# Altium PCB BRD111111.PcbDoc
Units mil, origin at the board's own origin, x right, y up, seen from the top; angles counter-clockwise.
Board outline 4736.44 x 3358.49 mil, 2 copper layers (Top Layer, Bottom Layer), stack 65.792 mil thick; 71 components, 46 nets, 247 pads, 110 vias.
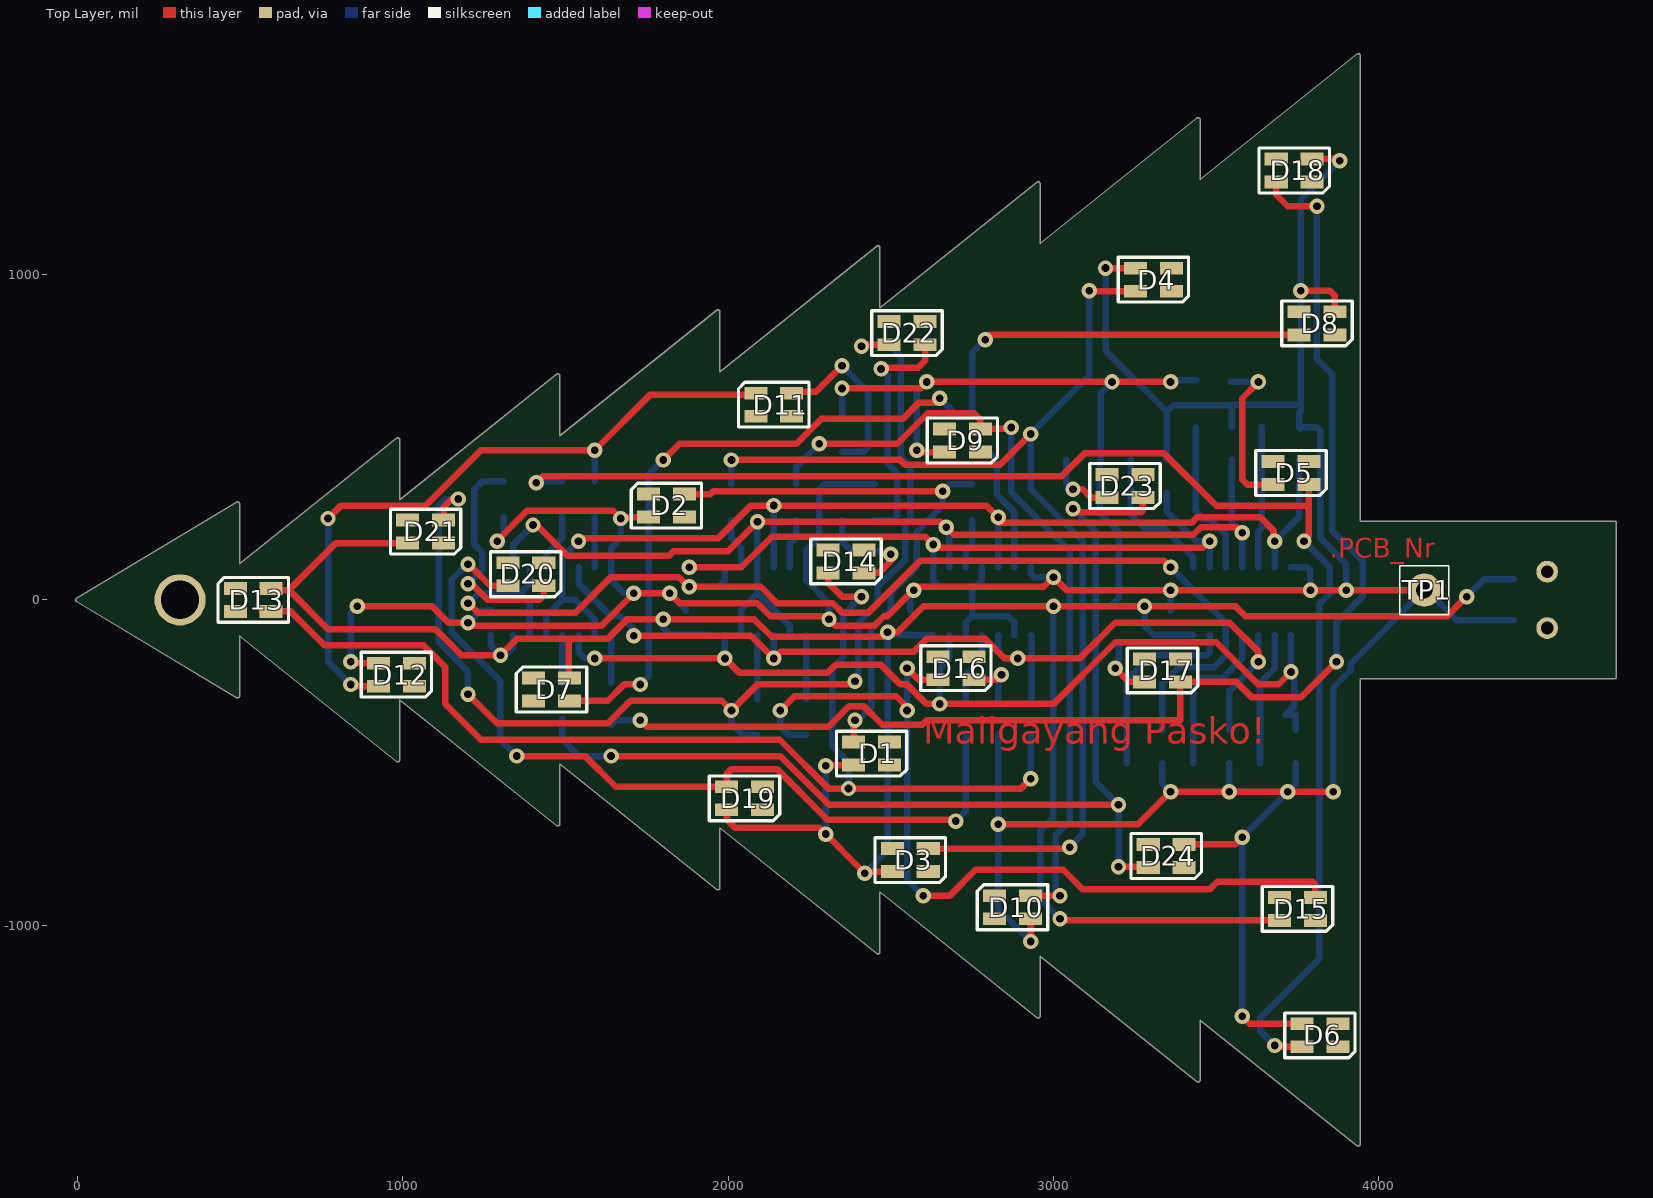
[diagram p0: Top Layer view]
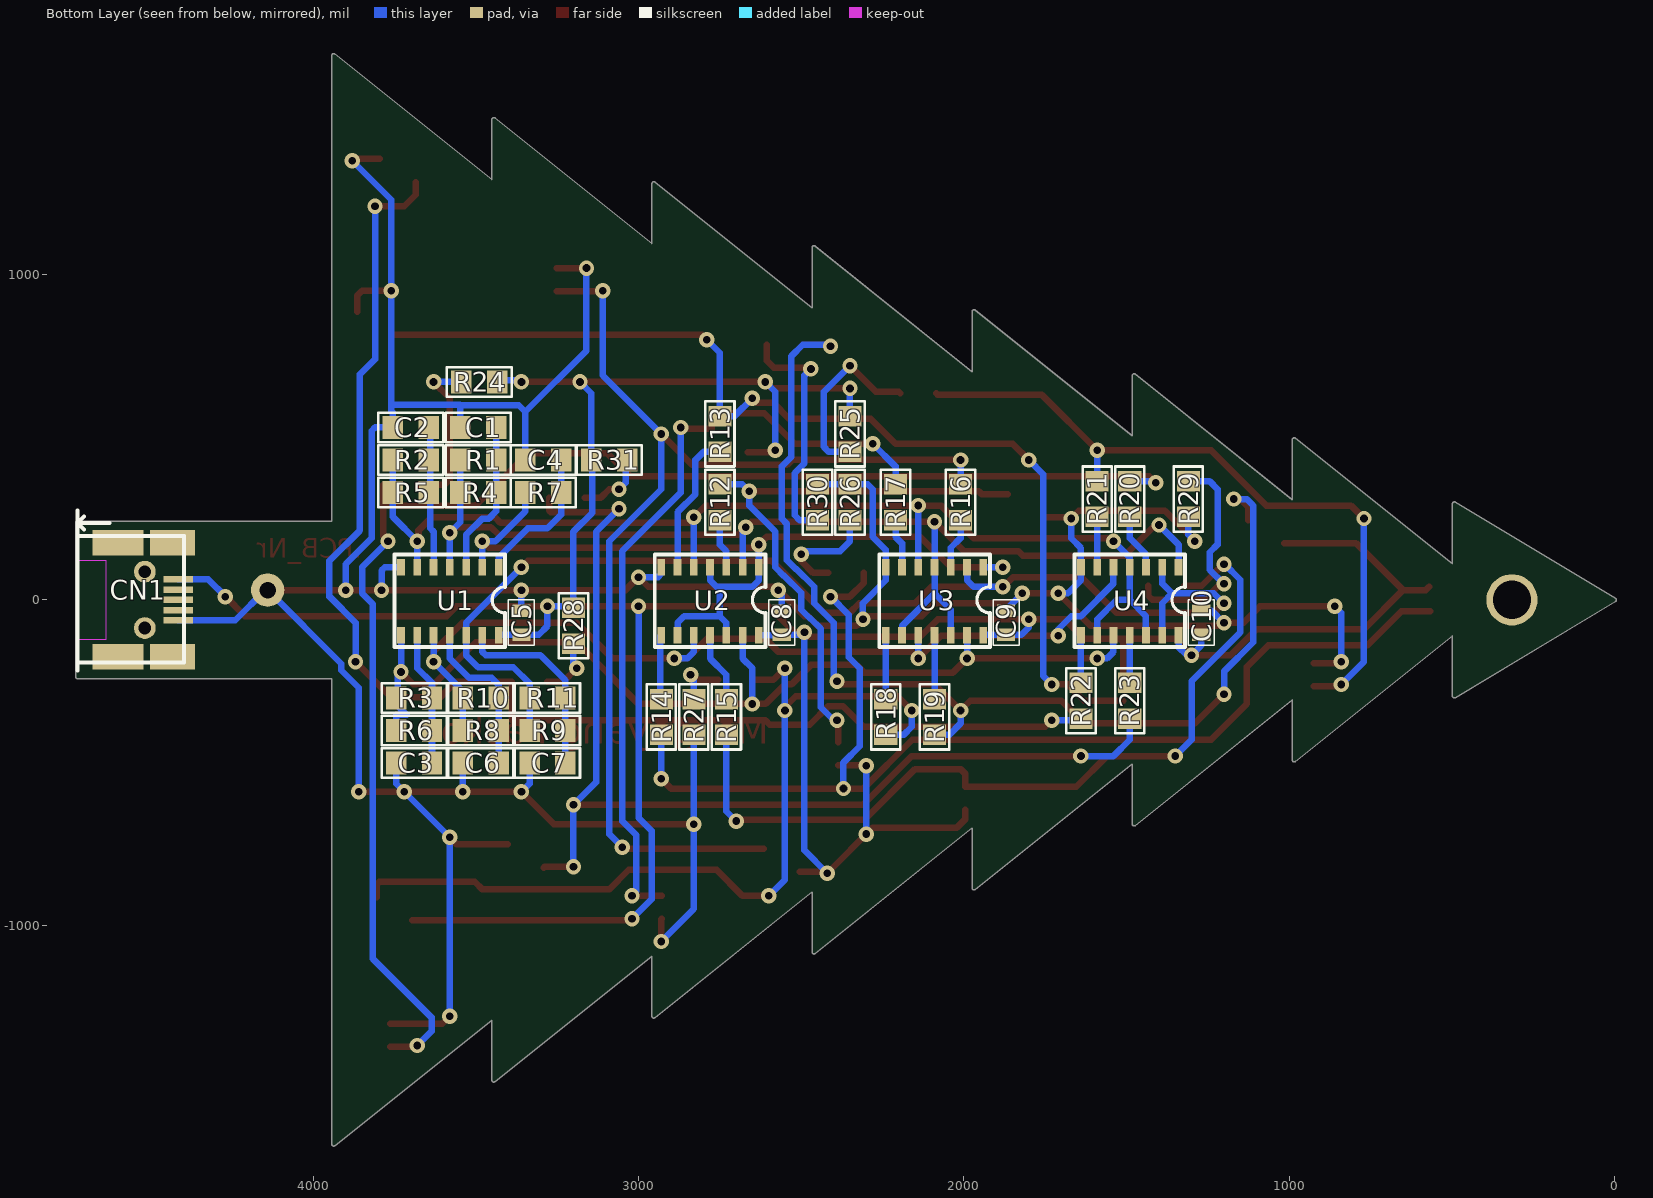
[diagram p1: Bottom Layer view, seen from below]
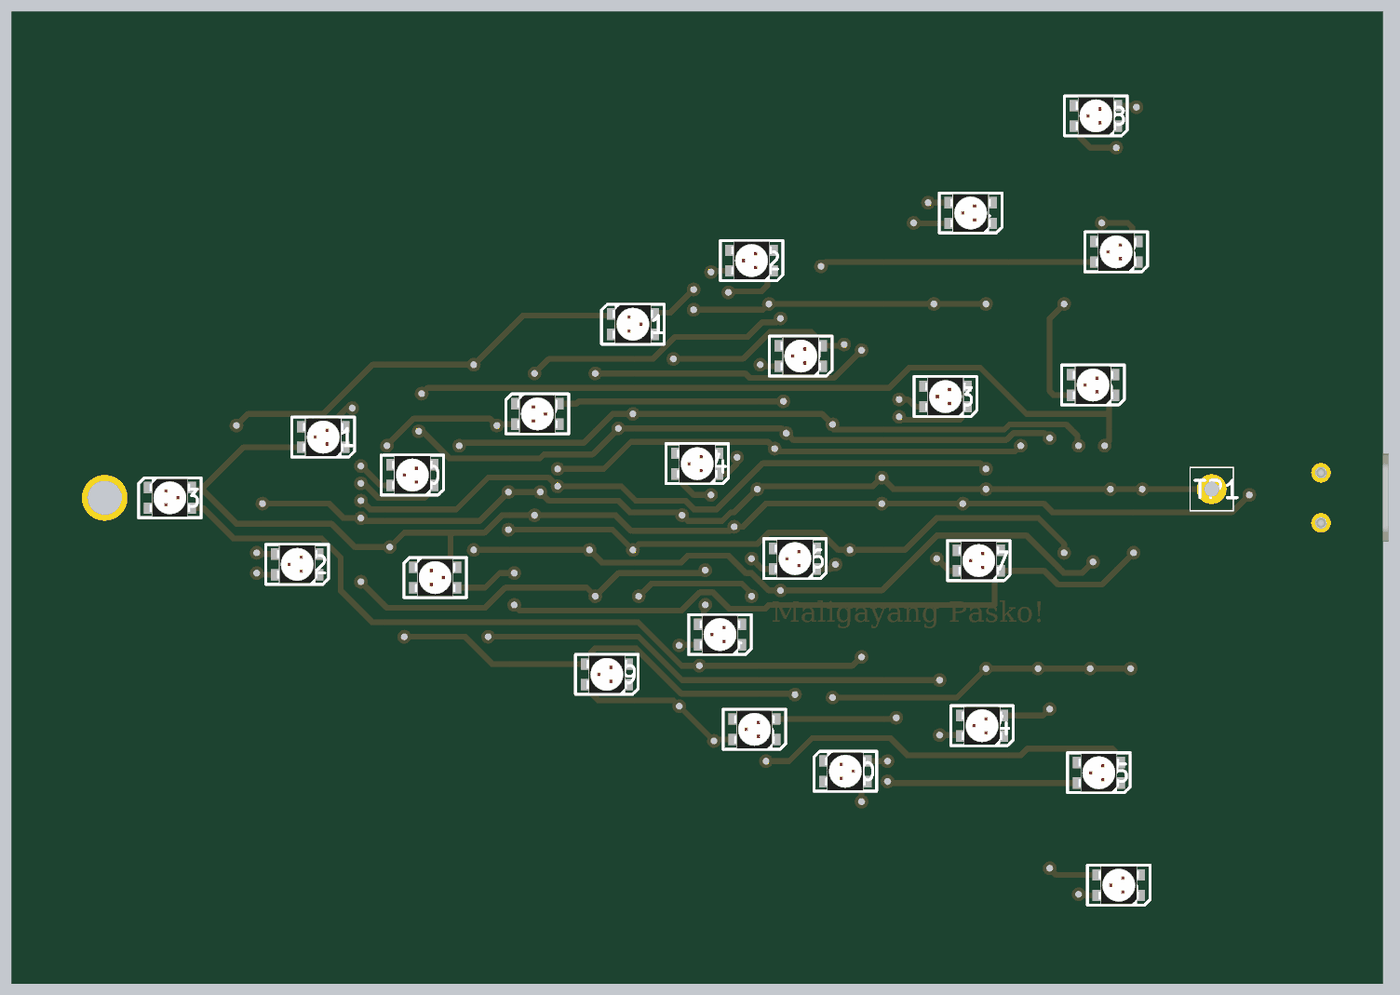
[diagram p2: 3D render of the assembled board from above, using the file's embedded part models]
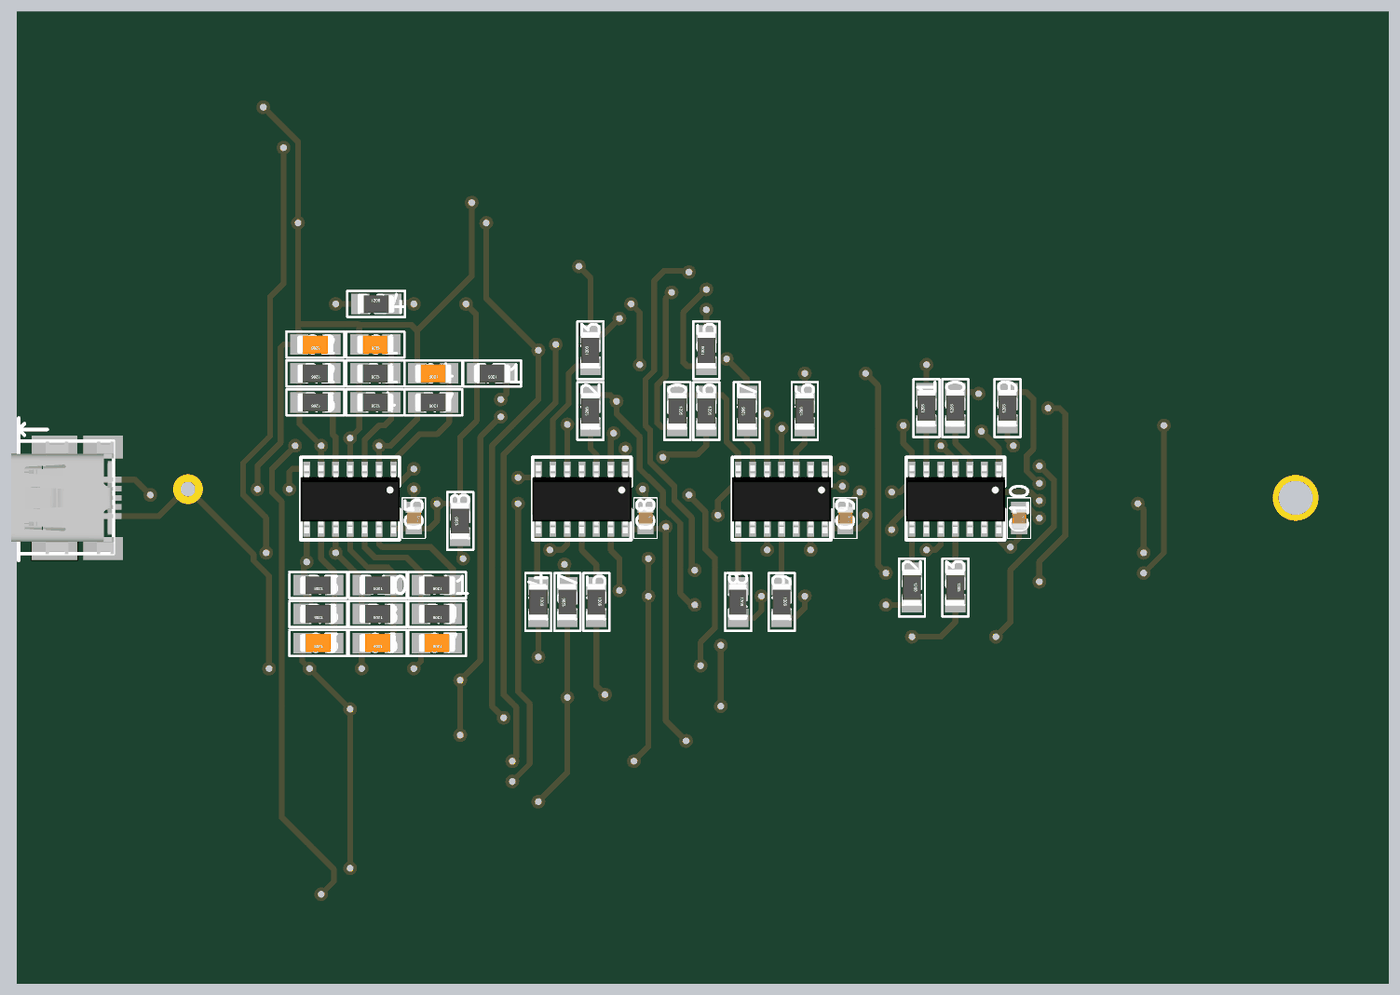
[diagram p3: 3D render of the assembled board from below, using the file's embedded part models]

## Layer stack, top to bottom
Top Layer: signal copper 1.4
Dielectric: core 62.9921, FR-4, Dk 4.8
Bottom Layer: signal copper 1.4

## Board outline
489.02,-300.43 ccw(c492.13,-295.28) 498.14,-295.28 498.14,-110.94 980.48,-496.81 980.49,-496.82 980.48,-496.81 ccw(c984.25,-492.13) 990.27,-492.13 990.27,-307.79 1472.6,-693.66 ccw(c1476.38,-688.98) 1482.39,-688.98 1482.39,-504.64 1964.73,-890.51 1964.75,-890.52 1964.73,-890.51 ccw(c1968.5,-885.83) 1974.52,-885.83 1974.52,-701.49 2456.85,-1087.36 2456.87,-1087.37 2456.85,-1087.36 ccw(c2460.63,-1082.68) 2466.64,-1082.68 2466.64,-898.34 2948.98,-1284.21 2949,-1284.22 2948.98,-1284.21 ccw(c2952.76,-1279.53) 2958.77,-1279.53 2958.77,-1095.19 3441.11,-1481.06 3441.12,-1481.07 3441.11,-1481.06 ccw(c3444.88,-1476.38) 3450.9,-1476.38 3450.9,-1292.04 3933.23,-1677.91 3933.25,-1677.93 3933.23,-1677.91 ccw(c3937.01,-1673.23) 3943.02,-1673.23 3943.02,-242.24 4724.41,-242.24 ccw(c4724.41,-236.22) 4730.42,-236.22 4730.42,236.22 ccw(c4724.41,236.22) 4724.41,242.24 3943.02,242.24 3943.02,1673.23 ccw(c3937.01,1673.23) 3933.23,1677.91 3933.25,1677.93 3933.23,1677.91 3450.9,1292.04 3450.9,1476.38 ccw(c3444.88,1476.38) 3441.11,1481.06 3441.12,1481.07 3441.11,1481.06 2958.77,1095.19 2958.77,1279.53 ccw(c2952.76,1279.53) 2948.98,1284.21 2949,1284.22 2948.98,1284.21 2466.64,898.34 2466.64,1082.68 ccw(c2460.63,1082.68) 2456.85,1087.36 2456.87,1087.37 2456.85,1087.36 1974.52,701.49 1974.52,885.83 ccw(c1968.5,885.83) 1964.73,890.51 1964.75,890.52 1964.73,890.51 1482.39,504.64 1482.39,688.98 ccw(c1476.38,688.98) 1472.6,693.66 1472.62,693.67 1472.6,693.66 990.27,307.79 990.27,492.13 ccw(c984.25,492.13) 980.48,496.81 980.49,496.82 980.48,496.81 498.14,110.94 498.14,295.28 ccw(c492.13,295.28) 489.02,300.43 489.03,300.43 489.02,300.43 -3.08,5.16 -3.09,5.16 ccw(c0,0) -3.08,-5.16

## Design rules (kind name [scope] priority, off if disabled: settings)
Clearance [All] p1: gap=10
HoleSize [All] p1: absolutevalues=TRUE maxlimit=125.98 minlimit=23.62 maxpercent=80.000 minpercent=20.000
MinimumAnnularRing [All] p1: minimumring=10
PolygonConnect [All] p1: connectstyle=Relief reliefconductorwidth=10 reliefentries=4 polygonreliefangle="90 Angle"
RoutingVias [All] p1: holewidth=23.62 width=47.24 viastyle="Through Hole" minholewidth=23.62 minwidth=47.24 maxholewidth=23.62 maxwidth=47.24
SilkscreenOverComponentPads [All] p1: minsilkscreentomaskgap=10
SolderMaskExpansion [All] p1: expansion=0
Width [All] p1: maxlimit=50 minlimit=20 preferedwidth=20
26 further rules are at their usual default settings.

## Components (designator, comment, footprint, x,y, rotation, side; value= is the part's Value field where it differs from the comment)
C1 "YCAM10U" CA_1206 3492.99,530 r0 bottom
C2 "YCAM10U" CA_1206 3700,530 r0 bottom
C3 "YCAM10U" CA_1206 3690,-501.49 r0 bottom
C4 "YCAM10U" CA_1206 3292.99,430 r0 bottom
C5 "YCAM100N-1" CA_0805 3360,-70 r90 bottom
C6 "YCAM10U" CA_1206 3484.88,-501.49 r0 bottom
C7 "YCAM10U" CA_1206 3280,-501.49 r0 bottom
C8 "YCAM100N-1" CA_0805 2560,-70 r90 bottom
C9 "YCAM100N-1" CA_0805 1870,-70 r90 bottom
C10 "YCAM100N-1" CA_0805 1270,-70 r90 bottom
CN1 "CNUSB04F4" CN_USB_AB_mini 4724.41,0 r180 bottom
D1 "NECM325C" DI_PLCC4 2440.94,-472.44 r0 top locked
D2 "NECM325C" DI_PLCC4 1810,290 r180 top locked
D3 "NECM325C" DI_PLCC4 2560,-800 r0 top locked
D4 "NECM325C" DI_PLCC4 3307.09,984.25 r0 top locked
D5 "NECM325C" DI_PLCC4 3730,390 r0 top locked
D6 "NECM325C" DI_PLCC4 3818.9,-1338.58 r0 top locked
D7 "NECM325C" DI_PLCC4 1456.69,-275.59 r180 top locked
D8 "NECM325C" DI_PLCC4 3810,850 r0 top locked
D9 "NECM325C" DI_PLCC4 2720,490 r0 top locked
D10 "NECM325C" DI_PLCC4 2874.02,-944.88 r180 top locked
D11 "NECM325C" DI_PLCC4 2140,600 r180 top locked
D12 "NECM325C" DI_PLCC4 980,-230 r0 top locked
D13 "NECM325C" DI_PLCC4 540,0 r180 top locked
D14 "NECM325C" DI_PLCC4 2362.2,118.11 r0 top locked
D15 "NECM325C" DI_PLCC4 3750,-950 r0 top locked
D16 "NECM325C" DI_PLCC4 2700,-210 r0 top locked
D17 "NECM325C" DI_PLCC4 3335.2,-216.85 r0 top locked
D18 "NECM325C" DI_PLCC4 3740,1320 r0 top locked
D19 "NECM325C" DI_PLCC4 2050,-610 r0 top locked
D20 "NECM325C" DI_PLCC4 1377.95,78.74 r0 top locked
D21 "NECM325C" DI_PLCC4 1070,210 r0 top locked
D22 "NECM325C" DI_PLCC4 2550,820 r0 top locked
D23 "NECM325C" DI_PLCC4 3220,350 r0 top locked
D24 "NECM325C" DI_PLCC4 3346.46,-787.4 r0 top locked
R1 "YRES10K" RE_1206 3492.99,430 r0 bottom
R2 "YRES10K" RE_1206 3700,430 r0 bottom
R3 "YRES10K" RE_1206 3690,-301.49 r0 bottom
R4 "YRES1K" RE_1206 3492.99,330 r0 bottom
R5 "YRES1K" RE_1206 3700,330 r0 bottom
R6 "YRES1K" RE_1206 3690,-401.49 r0 bottom
R7 "YRES10K" RE_1206 3292.99,330 r0 bottom
R8 "YRES10K" RE_1206 3484.88,-401.49 r0 bottom
R9 "YRES10K" RE_1206 3280,-401.49 r0 bottom
R10 "YRES1K" RE_1206 3484.88,-301.49 r0 bottom
R11 "YRES1K" RE_1206 3280,-301.49 r0 bottom
R12 "YRES120E_TBD" RE_1206 2750,300 r90 bottom
R13 "YRES120E_TBD" RE_1206 2750,510 r90 bottom
R14 "YRES120E_TBD" RE_1206 2930,-360 r270 bottom
R15 "YRES120E_TBD" RE_1206 2730,-360 r270 bottom
R16 "YRES120E_TBD" RE_1206 2010,300 r90 bottom
R17 "YRES120E_TBD" RE_1206 2210,300 r90 bottom
R18 "YRES120E_TBD" RE_1206 2240,-360 r270 bottom
R19 "YRES120E_TBD" RE_1206 2090,-360 r270 bottom
R20 "YRES120E_TBD" RE_1206 1490,310 r90 bottom
R21 "YRES120E_TBD" RE_1206 1590,310 r90 bottom
R22 "YRES120E_TBD" RE_1206 1640,-310 r270 bottom
R23 "YRES120E_TBD" RE_1206 1490,-310 r270 bottom
R24 "YRES150E" RE_1206 3490,670 r180 bottom
R25 "YRES150E" RE_1206 2350,510 r90 bottom
R26 "YRES150E" RE_1206 2350,300 r270 bottom
R27 "YRES150E" RE_1206 2830,-360 r90 bottom
R28 "YRES150E" RE_1206 3200,-80 r90 bottom
R29 "YRES150E" RE_1206 1310,310 r90 bottom
R30 "YRES150E" RE_1206 2450,300 r270 bottom
R31 "YRES150E" RE_1206 3090,430 r0 bottom
TP1 "CN001M1" CN_TP_TH_1.3mm 4140,30 r0 top
U1 "74HC14D" SC_SOIC14 3430,100 r270 bottom
U2 "74HC86D" SC_SOIC14 2630,100 r270 bottom
U3 "74HC86D" SC_SOIC14 1940,100 r270 bottom
U4 "74HC86D" SC_SOIC14 1340,100 r270 bottom

## Footprints (in the part's own frame and the unit in brackets; to place one, negate y for a bottom-side part, rotate by r counter-clockwise, add the part's x,y. Pads: shape width x height; smd on the part's side, far side on the other; paste and mask are expansions set on the pad)
CA_0805 [mil] "CA_0805"
  rect 38x56 smd: 1(-37,0) 2(37,0)
  silkscreen extent -70,-40 70,40, body extent -39,-26 39,24, height 31
CA_1206 [mm] "Chip Capacitor; Body 3.2 x 1.6 mm (LxW typ)"
  rect 1.6x1.8 smd: 1(-1.4,0) 2(1.4,0)
  silkscreen extent -2.54,-1.14 2.54,1.14, body extent -1.6,-0.8 1.6,0.8, height 1
CN_TP_TH_1.3mm [mm]
  round 2.6 hole 1.3: 1(0,0)
  silkscreen extent -1.91,-1.91 1.91,1.91, body extent -2.98,-2.99 3,2.99, height 1
CN_USB_AB_mini [mm] "Mini AB connector"
  rect 4x2 smd mask+0.102: 0(3.15,-4.45)
  rect 4x2 smd: 0(3.15,4.45)
  rect 3.5x2 smd: 0(7.4,-4.45) 0(7.4,4.45)
  rect 2.3x0.5 smd: 1(7.85,1.6) 2(7.85,0.8) 3(7.85,0) 4(7.85,-0.8) 5(7.85,-1.6)
  round 1.7 hole 1: ""(5.25,-2.2) ""(5.25,2.2)
  Top Layer pour cut-out: 0,3.1 2.2,3.1 2.2,-3.1 0,-3.1
  Top Layer keep-out region: 0,3.1 2.2,3.1 2.2,-3.1 0,-3.1
  silkscreen extent 0,-5.5 8.3,7, body extent -0.65,-4.95 8.35,4.95, height 4
DI_PLCC4 [mm] "RGB-LED"
  rect 1.8x1 smd: 1(1.4,-0.9) 2(1.4,0.9) 3(-1.4,0.9) 4(-1.4,-0.9)
  silkscreen extent -2.75,-1.75 2.75,1.75, body extent -1.8,-1.7 1.8,1.7, height 2
RE_1206 [mm] "Chip Resistor; Body 3.2 x 1.6 mm (LxW typ)"
  rect 1.6x1.8 smd: 1(-1.4,0) 2(1.4,0)
  silkscreen extent -2.54,-1.14 2.54,1.14, body extent -1.6,-0.8 1.6,0.8, height 1
SC_SOIC14 [mm] "14-Pin Small Outline Integrated Circuit 1.27 mm Pitch, IPC Medium Density"
  rect 1.3x0.6 smd: 1(0,0) 2(0,-1.27) 3(0,-2.54) 4(0,-3.81) 5(0,-5.08) 6(0,-6.35) 7(0,-7.62) 8(5.3,-7.62) 9(5.3,-6.35) 10(5.3,-5.08) 11(5.3,-3.81) 12(5.3,-2.54) 13(5.3,-1.27) 14(5.3,0)
  silkscreen extent -1.02,-8.13 6.22,0.51, body extent -0.33,-8.15 5.66,0.54, height 1.44

## Part data
R1 R2 R3 R4 R5 R6 R7 R8 R9 R10 R11 R12 R13 R14 R15 R16 R17 R18 R19 R20 R21 R22 R23 R24 R25 R26 R27 R28 R29 R30 R31: "Resistor"

## Free pads (board coordinates)
  round 157.48 hole 118.11: 0(314.96,0)

## Via types
v1: diameter 47.24, hole 23.62, Top Layer to Bottom Layer, tented both sides, 110 vias

## Nets (pads, with @x,y where several pads share a name; then routed paths per layer and width w, separated by ;. In a path a pad name is that pad's centre, name@x,y a point inside that pad or via, vN(x,y) a via of type N, cw(c..) or ccw(c..) an arc to the next point about the centre after c; other vN are vias at no path point)
+5V: C5.1 C8.1 C9.1 C10.1 CN1.1 D1.4 D3.4 D7.4 D9.4 D13.4 D15.4 D19.4 D21.4 R24.2 R25.2 R28.2 R31.2 U1.14 U2.14 U3.14 U4.14 | length 11042.6
  Top Layer w20: D13.4@570,40 580,30 650,30 ; D21.4 794.57,174.57 650,30 ; D7.4@1510,-240 1510,-130 1520,-120 ; D19.4 1994.88,-673.78 2021.1,-700 2280,-700 v1(2420,-840) 2424.57,-835.43 D3.4 ; 2133.62,-113.62 2080,-60 v1(1800,-60) 1688.66,-60 1628.66,-120 1520,-120 ; 2140,-113.62 2476.38,-113.62 v1(2490,-100) 2520,-100 2600,-20 v1(3000,-20) v1(3280,-20) 3560,-20 3590,-50 4210,-50 v1(4270,10) ; v1(2300,-510) 2302.13,-507.87 D1.4 ; v1(2350,650) 2590,650 v1(2610,670) v1(3180,670) v1(3360,670) ; v1(2580,460) 2585.43,454.57 D9.4 ; v1(3020,-980) 3025.43,-985.43 D15.4 ; 650,30 770,-90 1100,-90 1180,-170 v1(1300,-170) 1350,-120 1520,-120
  Bottom Layer w20: C10.1 1270,-140 v1(1300,-170) 1315,-170 1340,-145 U4.14 ; v1(1800,-60) 1800,-84 1823,-107 C9.1 1938.34,-107 U3.14 ; v1@2300,-730 v1(2300,-510) ; R25.2 v1(2350,650) ; v1(2420,-840) 2490,-770 v1(2490,-100) 2497,-107 C8.1 ; C8.1@2561.66,-108.66 U2.14 ; v1(2580,460) 2580,640 v1(2610,670) ; v1(3000,-20) 3000,-670 2960,-710 2960,-920 v1(3020,-980) ; v1(3180,670) 3145.12,635.12 R31.2 3142.56,427.44 3142.56,267.44 3200,210 3200,182.43 3200.16,182.26 3200.16,157.41 3200,157.24 3200,4.88 3175.12,-20 v1(3280,-20) 3280,-80 3307,-107 C5.1 3428.34,-107 U1.14 ; v1(3360,670) 3365,675 R24.2@3439.76,675 ; v1(4270,10) 4322.99,62.99 CN1.1
  other v1: 2300,-720
GND: C1.2 C2.2 C3.2 C4.2 C5.2 C6.2 C7.2 C8.2 C9.2 C10.2 CN1.5 D2.2 D4.3 D6.3 D8.2 D10.3 D12.3 D18.2 D24.2 R26.1 R27.1 R29.1 R30.1 TP1.1 U1.7 U2.7 U3.7 U4.7 | length 12978.1
  Top Layer w20: v1(840,-190) 844.57,-194.57 D12.3 ; v1(860,-20) 1090,-20 1140,-70 v1(1200,-70) 1210,-80 1610,-80 v1(1710,20) v1(1820,20) 1850,-10 2090,-10 2130,-50 2300,-50 v1(2310,-60) 2330,-80 2448.31,-80 2478.31,-50 2490,-50 v1(2570,30) ; v1(1290,180) 1290,181.69 1381.93,273.62 1646.38,273.62 v1(1670,250) 1674.57,254.57 D2.2 ; v1@2580,40 2970,40 v1(3000,70) 3040,30 v1(3360,30) v1(3790,30) v1(3900,30) TP1.1 ; v1(2830,-690) 3260,-690 v1(3360,-590) v1(3540,-590) v1(3720,-590) v1(3860,-590) ; D10.3 2930,-981.18 v1(2930,-1050) ; v1(3160,1020) 3251.65,1020 D4.3 ; D24.2 3558.03,-751.97 v1(3580,-730) ; v1(3580,-1280) 3603.15,-1303.15 D6.3 ; v1(3760,950) 3850,950 3865.12,934.88 D8.2 ; D18.2 3874.57,1355.43 v1(3880,1350)
  Bottom Layer w20: v1(840,-190) 840,-40 v1(860,-20) ; v1(1200,-70) 1201.69,-70 1238.69,-33 C10.2 C10.2@1267,-30 ; v1(1290,180) 1310,200 R29.1 ; v1(1670,250) 1670,189.33 1640,159.33 U4.7 1640,60 1680,20 v1(1710,20) ; v1(1820,20) 1870,-30 C9.2 ; v1(2310,-60) 2310,-10 2240,60 U3.7 2240,153.62 2280,193.62 2280,340 2295.12,355.12 R26.1 R30.1 ; C8.2 2560,20 v1(2570,30) ; R27.1 v1(2830,-690) 2830,-950 v1(2930,-1050) ; U2.7 2930,80 2940,70 v1@2990,70 ; v1(3160,1020) 3160,766.21 3348.1,578.1 ; C7.2 3335.11,-565.11 v1(3360,-590) ; C4.2 3348.1,578.1 ; C5.2 v1(3360,30) ; v1(3540,-590) 3540,-560 C6.2 ; C1.2 3548.1,598.1 ; v1(3580,-1280) v1(3580,-730) v1(3720,-590) 3745.11,-564.89 C3.2 ; U1.7 3780,100 3790,90 v1(3790,30) ; C2.2@3758.74,526.38 C2.2 ; v1(3860,-590) 3860,-270 3913.62,-216.38 3913.62,-196.38 TP1.1 4147.01,30 4240,-62.99 CN1.5 ; v1(3880,1350) 3760,1230 v1(3760,950) 3760,600 ; v1(3900,30) 3900,110 3820,190 3820,520 3810,530 C2.2 ; 3348.1,578.1 3368.1,598.1 3548.1,598.1 ; 3548.1,598.1 3550,600 3760,600 ; C2.2 3755.12,575.12 3760,580 3760,600
L1: D1.3 D2.4 R12.2 | length 1789.2
  Top Layer w20: D2.4 1945.43,325.43 1953.62,333.62 v1(2660,333.62) ; D1.3 2385.83,-374.17 v1(2390,-370)
  Bottom Layer w20: v1(2390,-370) 2400,-370 2440,-330 2440,-88.31 2471.93,-56.38 2473.62,-56.38 2500,-30 2500,21.69 2551.93,73.62 2553.62,73.62 2580,100 2580,210 2660,290 v1(2660,333.62) 2681.5,355.12 R12.2
L2: D7.3 D8.4 R13.2 | length 3235.7
  Top Layer w20: D7.3 1511.02,-311.02 1510,-310 1630,-310 1680,-260 v1(1730,-260) ; v1(1800,430) 1850,480 2210,480 2286.38,556.38 2536.38,556.38 2586.38,606.38 2636.38,606.38 v1(2650,620) ; v1(2790,800) 2804.57,814.57 D8.4
  Bottom Layer w20: v1(1730,-260) 1756.38,-233.62 1756.38,386.38 v1(1800,430) ; v1(2650,620) 2704.88,565.12 R13.2 2750,760 v1(2790,800)
L3: D13.3 D14.4 R14.2 | length 3601.1
  Top Layer w20: D13.3@566.93,-35.43 655.43,-35.43 760,-140 1063.95,-140 1130,-206.05 1130,-320 1240,-430 2158.31,-430 2308.31,-580 v1(2370,-580) 2900,-580 v1(2930,-550) ; D14.4 2307.09,52.91 2350,10 v1(2410,10)
  Bottom Layer w20: v1(2370,-580) 2370,-500 2320,-450 2320,-210 2353.62,-176.38 2353.62,-46.38 v1(2410,10) ; v1(2930,-550) R14.2
L4: D19.3 D20.4 R15.2 | length 2623.5
  Top Layer w20: v1(1200,110) 1201.69,110 1268.38,43.31 D20.4 ; v1(1350,-480) 1560,-480 1654.57,-574.57 D19.3 1994.88,-535.12 2010,-520 2150,-520 2306.38,-676.38 2696.38,-676.38 v1(2700,-680)
  Bottom Layer w20: v1(1200,110) 1198.31,110 1150,61.69 1150,-100 1300,-250 1300,-430 v1(1350,-480) ; v1(2700,-680) 2730,-650 R15.2
L5: D3.2 D4.4 R16.2 | length 3487.2
  Top Layer w20: v1(2010,430) 2528.5,430 2543.62,414.88 2834.88,414.88 v1(2930,510) ; D3.2 3045.43,-764.57 v1(3050,-760) ; v1(3110,950) 3111.18,948.82 D4.4
  Bottom Layer w20: R16.2 v1(2010,430) ; v1(3050,-760) 3090,-720 3090,180 2930,340 v1(2930,510) 3110,690 v1(3110,950)
L6: D9.2 D10.4 R17.2 | length 2451.1
  Top Layer w20: v1(2280,480) 2520,480 2613.62,573.62 2756.38,573.62 2775.12,554.88 D9.2 2865.43,525.43 v1(2870,530) ; D10.4 2929.69,-910 v1(3020,-910)
  Bottom Layer w20: R17.2 2210,410 v1(2280,480) ; v1(2870,530) 2870,330 3050,150 3050,-680 3006.38,-723.62 3006.38,-896.38 v1(3020,-910)
L7: D15.2 D16.4 R18.2 | length 2732.8
  Top Layer w20: v1(2160,-340) 2203.62,-296.38 2516.38,-296.38 2560,-340 v1(2550,-340) ; v1(2550,-210) 2585.43,-245.43 D16.4 ; v1(2600,-910) 2680,-910 2760,-830 3030,-830 3090,-890 3480,-890 3503.62,-866.38 3796.38,-866.38 3805.12,-875.12 D15.2
  Bottom Layer w20: v1(2160,-340) 2160,-390 2185.12,-415.12 R18.2 ; v1(2550,-210) 2550,-860 v1(2600,-910)
L8: D21.2 D22.4 R19.2 | length 3534.4
  Top Layer w20: D21.2 1125.12,285.12 1150,310 v1(1170,310) ; v1(1200,-290) 1290,-380 1630,-380 1700,-310 1980,-310 v1(2010,-340) 2090,-260 2380,-260 v1(2390,-250) ; v1(2410,780) 2414.57,784.57 D22.4
  Bottom Layer w20: v1(1170,310) 1130,310 1110,290 1110,-130 1200,-220 v1(1200,-290) ; v1(2010,-340) 2010,-380 2045.12,-415.12 R19.2 R19.2@2085.12,-420 ; v1(2390,-250) 2400,-240 2400,-70 2460,-10 2460,40 2516.38,96.38 2518.07,96.38 2543.62,121.93 2543.62,233.62 2560,250 2560,410 2530,440 2530,749.45 2494.88,784.57 2414.57,784.57 v1(2410,780)
L9: D5.1 D6.4 R20.2 | length 4516.8
  Top Layer w20: v1(1410,360) 1430,380 3025,380 3095,450 3340,450 3500,290 3785.12,290 ; v1(3680,-1370) 3684.02,-1374.02 D6.4 ; v1(3770,180) 3785.12,195.12 3785.12,290 ; D5.1 3785.12,290
  Bottom Layer w20: v1(1410,360) 1415.12,365.12 R20.2 ; v1(3680,-1370) 3636.38,-1326.38 3636.38,-1283.62 3816.38,-1103.62 3816.38,-13.62 3850,20 3850,100 v1(3770,180)
L10: D11.1 D12.4 R21.2 | length 2195.9
  Top Layer w20: v1(770,250) 810,290 1070,290 1240,460 v1(1590,460) 1760,630 2080,630 2084.88,634.88 D11.1 ; v1(840,-260) 845.43,-265.43 D12.4
  Bottom Layer w20: v1(770,250) 770,-190 v1(840,-260) ; R21.2 v1(1590,460)
L11: D17.1 D18.4 R22.2 | length 4173.5
  Top Layer w20: v1(1730,-370) 1720,-380 1740,-380 1750,-390 2308.31,-390 2371.93,-326.38 2416.38,-326.38 2473.62,-383.62 2596.38,-383.62 2610,-370 3390,-370 3390,-310 ; D18.4 3684.88,1245.12 3720,1210 v1(3810,1210) ; v1(3870,-190) 3760,-300 3610,-300 3562.28,-252.28 D17.1 3390.32,-300 ; 3390,-310 3390.32,-309.68 3390.32,-300 ; 3390,-310 3390,-300.32 3390.32,-300
  Bottom Layer w20: R22.2@1640,-385.12 1655.12,-370 v1@1720,-370 ; v1(3810,1210) 3810,740 3856.38,693.62 3856.38,213.62 3950,120 3950,10 3870,-70 v1(3870,-190)
L12: D23.1 D24.4 R23.2 | length 3369.1
  Top Layer w20: v1(1640,-480) 2160,-480 2310,-630 v1(3200,-630) ; v1(3060,280) 3070,270 3270,270 3275.12,275.12 D23.1 ; v1(3200,-820) 3288.5,-820 D24.4
  Bottom Layer w20: R23.2 1490,-430 1540,-480 v1(1640,-480) ; v1(3060,280) 3130,210 3130,-560 v1(3200,-630) v1(3200,-820)
NetC1_1: C1.1 R1.1 R4.1 U1.3 | length 479.9
  Bottom Layer w20: C1.1 R1.1 R4.1 3437.87,272.13 3460,250 3480,250 3530,200 U1.3
NetC2_1: C2.1 R2.1 R5.1 U1.5 | length 436.7
  Bottom Layer w20: U1.5 3630,210 3640,220 3640,332.6 3640,432.6 C2.1@3640,532.6
NetC3_1: C3.1 R3.1 R6.1 U1.9 | length 411.5
  Bottom Layer w20: C3.1 R6.1 R3.1 3634.88,-255.12 3680,-210 U1.9
NetC4_1: C4.1 R7.1 U1.1 | length 444.7
  Bottom Layer w20: C4.1 R7.1 3237.87,262.13 3280,220 3340,220 3430,130 U1.1
NetC6_1: C6.1 R8.1 R10.1 U1.11 | length 495.2
  Bottom Layer w20: C6.1 R8.1 R10.1 3429.76,-261.73 3451.49,-240 3520,-240 3580,-180 U1.11
NetC7_1: C7.1 R9.1 R11.1 U1.13 | length 597.2
  Bottom Layer w20: C7.1 R9.1 R11.1 3224.88,-246.61 3301.49,-170 3470,-170 3480,-160 U1.13
NetD5_4: D5.4 R24.1 | length 506.9
  Top Layer w20: v1(3630,670) 3580,620 3580,370 3595.43,354.57 D5.4
  Bottom Layer w20: R24.1 v1(3630,670)
NetD11_4: D11.4 R25.1 | length 559.3
  Top Layer w20: D11.4 2199.68,640 2270,640 v1(2350,720)
  Bottom Layer w20: R25.1 2414.88,454.88 2430,470 2430,640 v1(2350,720)
NetD14_1: D14.1 R26.2 | length 355.9
  Top Layer w20: D14.1 2463.4,82.68 2500,119.28 v1(2500,140)
  Bottom Layer w20: R26.2 2350,180 2380,150 2500,150 v1(2500,140)
NetD16_1: D16.1 R27.2 | length 170.3
  Top Layer w20: D16.1 2824.57,-245.43 v1(2840,-230)
  Bottom Layer w20: R27.2 2830,-240 v1(2840,-230)
NetD17_4: D17.4 R28.1 | length 186.6
  Top Layer w20: v1(3190,-210) 3232.28,-252.28 D17.4
  Bottom Layer w20: v1(3190,-210) 3200,-200 R28.1
NetD20_1: D20.1 R29.2 | length 708.7
  Top Layer w20: v1(1200,50) 1210,50 1260,0 1420,0 1433.07,13.07 D20.1
  Bottom Layer w20: v1(1200,50) 1201.69,50 1243.62,91.93 1243.62,146.38 1220,170 1220,340 1245.12,365.12 R29.2
NetD22_1: D22.1 R30.2 | length 742.1
  Top Layer w20: v1(2470,710) 2473.62,713.62 2583.86,713.62 2605.12,734.88 D22.1
  Bottom Layer w20: R30.2 2504.88,244.88 2520,260 2520,390 2490,420 2490,690 v1(2470,710)
NetD23_4: D23.4 R31.1 | length 213.7
  Top Layer w20: v1(3060,340) 3090,340 3115.43,314.57 D23.4
  Bottom Layer w20: R31.1@3040,430 3040,360 v1(3060,340)
NetR12_1: R12.1 U2.3 | length 153.2
  Bottom Layer w20: U2.3 2730,150 2750,170 R12.1
NetR13_1: R13.1 U2.6 | length 438.2
  Bottom Layer w20: R13.1 2800.24,454.88 2825.12,430 2825.12,324.88 2880,270 U2.6
NetR14_1: R14.1 U2.8 | length 199.2
  Bottom Layer w20: R14.1 2933.62,-301.26 2933.62,-112.28 U2.8
NetR15_1: R15.1 U2.11 | length 216.9
  Bottom Layer w20: R15.1 2730,-230 2780,-180 U2.11
NetR16_1: R16.1 U3.3 | length 157.3
  Bottom Layer w20: R16.1 2010,190 2040,160 U3.3
NetR17_1: R17.1 U3.6 | length 153.2
  Bottom Layer w20: U3.6 2190,173.62 2210,193.62 R17.1
NetR18_1: R18.1 U3.8 | length 196.2
  Bottom Layer w20: R18.1 U3.8
NetR19_1: R19.1 U3.11 | length 196.2
  Bottom Layer w20: R19.1 U3.11
NetR20_1: R20.1 U4.3 | length 175.6
  Bottom Layer w20: U4.3 1440,140 1490,190 R20.1
NetR21_1: R21.1 U4.6 | length 154.9
  Bottom Layer w20: U4.6 R21.1
NetR22_1: R22.1 U4.8 | length 146.2
  Bottom Layer w20: R22.1 U4.8
NetR23_1: R23.1 U4.11 | length 146.2
  Bottom Layer w20: R23.1 U4.11
OSC1: R7.2 U1.2 U2.1 U2.4 U2.9 U2.12 U3.1 | length 2699.5
  Top Layer w20: v1(1880,100) 2040,100 2133.62,193.62 2606.38,193.62 v1(2630,170) v1@2640,160 ; v1@2630,160 3460,160 3470,170 v1@3480,170
  Bottom Layer w20: v1@1880,110 v1(1880,100) U3.1 ; v1(2630,170) U2.1 2630,60 2650,40 2760,40 ; U2.12 2730,-70 2750,-50 ; U2.4 2780,60 2760,40 ; U2.9 2880,-70 2860,-50 2750,-50 ; R7.2 3348.1,271.9 3440,180 v1(3480,180) U1.2 ; 2750,-50 2750,30 2760,40
OSC2: R1.2 R4.2 U1.4 U2.2 U3.4 U3.9 U3.12 U4.1 | length 3448.4
  Top Layer w20: v1@1411.69,230 1505.31,136.38 1818.8,136.38 1832.43,150 2000,150 v1(2090,240) 2653.23,240 v1(2670,223.23) 2693.23,200 3430,200 3453.62,223.62 3562.76,223.62 v1(3580,206.38)
  Bottom Layer w20: U4.1 1340,170 v1(1400,230) ; U3.12 2040,-30 2090,20 ; v1(2090,240) U3.4 2090,20 ; U3.9 2190,-80 2090,20 ; v1(2670,223.23) 2680,213.23 U2.2 ; R1.2 R4.2 3548.1,238.27 v1(3580,206.38) U1.4
OSC3: R2.2 R5.2 U1.6 U2.5 U3.5 U4.4 U4.9 U4.12 | length 3479.3
  Top Layer w20: v1(1540,180) 1550,190 1970,190 2070,290 v1(2140,290) 2793.62,290 v1(2830,253.62) 2830,240 2833.62,236.38 3423.95,236.38 3441.2,253.62 3636.38,253.62 3676.38,213.62 3676.38,183.62 v1(3680,180)
  Bottom Layer w20: U4.12 1440,-50 1490,0 ; v1(1540,180) 1490,130 U4.4 1490,0 ; U4.9 1590,-60 1530,0 1490,0 ; U3.5 v1(2140,290) ; U2.5 v1(2830,253.62) ; U1.6 v1(3680,180) 3755.12,255.12 R5.2 R2.2
OSC4: R8.2 R10.2 U1.10 U2.10 U3.10 U4.5 | length 2931.4
  Top Layer w20: v1(1710,-110) 2070,-110 v1(2140,-180) 2160,-160 2570,-160 2610,-120 2790,-120 2850,-180 v1(2890,-180) 3080,-180 3190,-70 3541.34,-70 3630,-158.66 v1(3630,-190)
  Bottom Layer w20: U4.5 1540,50 1640,-50 1670,-50 1710,-90 v1(1710,-110) ; v1(2140,-180) U3.10 ; U2.10 2830,-160 2850,-180 v1(2890,-180) ; R8.2 R10.2 3540,-280 v1(3630,-190) U1.10
OSC5: R3.2 R6.2 U1.8 U2.13 U3.13 U4.10 | length 3120.2
  Top Layer w20: v1(1590,-180) v1(1990,-180) 2033.62,-223.62 2306.38,-223.62 2330,-200 2470,-200 2530,-260 2550,-260 2610,-320 v1(2650,-320) 3000,-320 3190,-130 3500,-130 3627.5,-257.5 ; 3627.5,-258.99 3692.5,-258.99 v1(3730,-221.49)
  Bottom Layer w20: U4.10 1540,-160 1560,-180 v1(1590,-180) ; v1(1990,-180) U3.13 ; v1(2650,-320) 2650,-210 2680,-180 U2.13 ; v1@3730,-211.49 v1(3730,-221.49) ; U1.8 v1(3730,-221.49) ; R6.2 3745.11,-353.78 3712.59,-353.78 3740,-326.38 3740,-231.49 v1(3730,-221.49)
OSC6: R9.2 R11.2 U1.12 U3.2 U4.2 U4.13 | length 3638.3
  Top Layer w20: v1@1200,-20 v1(1200,-10) 1201.69,-10 1231.69,-40 1530,-40 1640,70 1848.31,70 1878.31,40 v1(1880,40) 2100,40 2150,-10 2321.69,-10 2351.69,-40 2430,-40 2589.7,119.7 3340.3,119.7 v1(3360,100)
  Bottom Layer w20: v1@1200,-20 v1(1200,-10) 1201.69,-10 1231.69,20 1360,20 ; U4.13 1390,-10 1360,20 ; U4.2 1390,50 1360,20 ; v1(1880,40) 1970,40 1990,60 U3.2 ; R9.2 R11.2 3335.11,-256.38 3384.76,-206.73 3493.27,-206.73 3530,-170 U1.12 3530,-70 v1(3360,100)
pads on no net: CN1. CN1.0 CN1.2 CN1.3 CN1.4 D1.1 D1.2 D2.1 D2.3 D3.1 D3.3 D4.1 D4.2 D5.2 D5.3 D6.1 D6.2 D7.1 D7.2 D8.1 D8.3 D9.1 D9.3 D10.1 D10.2 D11.2 D11.3 D12.1 D12.2 D13.1 D13.2 D14.2 D14.3 D15.1 D15.3 D16.2 D16.3 D17.2 D17.3 D18.1 D18.3 D19.1 D19.2 D20.2 D20.3 D21.1 D21.3 D22.2 D22.3 D23.2 D23.3 D24.1 D24.3

## Other copper
Top Layer:
  text ".PCB_Nr" at 3850,130 h60
  text "Maligayang Pasko!" at 2600,-470 h140

## Silkscreen, mask and mechanical layers (free items; w line width, h text height)
PCBoutline:
  lines w12: 1476.38,688.98 984.25,295.28 984.25,492.13 492.13,98.43 492.13,295.28 0,0 492.13,-295.28 492.13,-98.43 984.25,-492.13 984.25,-295.28 1476.38,-688.98 1476.38,-492.13 1968.5,-885.83 1968.5,-688.98 2460.63,-1082.68 2460.63,-885.83 2952.76,-1279.53 2952.76,-1082.68 3444.88,-1476.38 3444.88,-1279.53 3937.01,-1673.23 3937.01,-1476.38 ; 1477.87,690 1477.87,493.15 1970,886.85 1970,690 2462.13,1083.7 2462.13,886.85 2954.25,1280.55 2954.25,1083.7 ; 2952.76,1082.68 3444.88,1476.38 3444.88,1279.53 3937.01,1673.23 3937.01,1574.8 3937.01,236.22 4724.41,236.22 4724.41,-236.22 3937.01,-236.22 3937.01,-1574.8
Mechanical 16:
  drawing of 3375 lines, arcs and shapes, not listed
  text "D" at -663,2115 h70 r270
  text "C" at 1227,2115 h70 r270
  text "B" at 3137,2115 h70 r270
  text "A" at 5029,2115 h70 r270
  text "2" at -1465,777 h70 r270
  text "2" at 5935,777 h70 r270
  text "1" at -1465,-2083 h70 r270
  text "1" at 5935,-2083 h70 r270
  text "ENGINEER:" at 1420,-2209 h45
  text "TITLE:" at 2920,-2209 h45
  text ".ProjectNaam" at 3170,-2477 h98.43
  text "PCB DESIGNER:" at 1420,-2504 h45
  text ".DrawnByX" at 1925,-2621 h98.43
  text "TRAFICON" at 215,-2787 h60
  text "DATE:" at 1420,-2809 h45
  text "PART NO.:" at 2920,-2809 h45
  text "REV:" at 5020,-2809 h45
  text "Vlamingstraat 19" at 215,-2912 h60
  text ".VariantName" at 3270,-2921 h78.74
  text ".PRINT_DATE" at 1470,-2929 h70
  text ".RevisionNR" at 5022,-2942 h98.43
  text "B-8560 Wevelgem" at 220,-3032 h60
  text "FILE NAME:" at 1420,-3109 h45
  text "DWG NO:" at 2920,-3109 h45
  text "SCALE:" at 5020,-3109 h45
  text ".PCB_Nr" at 3273,-3205 h98.43
  text ".PCB_FILE_NAME_NO_PATH" at 1470,-3229 h70
  text "D" at -663,-3435 h70 r270
  text "C" at 1227,-3435 h70 r270
  text "B" at 3137,-3435 h70 r270
  text "A" at 5029,-3435 h70 r270
Drill Drawing:
  lines w12: -1279.53,-1968.5 -1279.53,-2066.93 -1181.1,-2066.93 ; -1279.53,1870.08 -1279.53,1968.5 -1181.1,1968.5 ; 5708.66,-2066.93 5807.09,-2066.93 5807.09,-1968.5 ; 5708.66,1968.5 5807.09,1968.5 5807.09,1870.08
  text ".Legend" at -850,-2060 h60
Mechanical 17:
  drawing of 3375 lines, arcs and shapes, not listed
  text "A" at -489,2115 h70 r90
  text "B" at 1403,2115 h70 r90
  text "C" at 3313,2115 h70 r90
  text "D" at 5203,2115 h70 r90
  text "2" at -1395,777 h70 r90
  text "2" at 6005,777 h70 r90
  text "1" at -1395,-2083 h70 r90
  text "1" at 6005,-2083 h70 r90
  text "TITLE:" at 1620,-2209 h45
  text "ENGINEER:" at 3120,-2209 h45
  text ".ProjectNaam" at 1405,-2469 h98.43
  text "PCB DESIGNER:" at 3120,-2504 h45
  text ".DrawnByX" at 2630,-2624 h98.43
  text "TRAFICON" at 4325,-2787 h60
  text "REV:" at -480,-2809 h45
  text "PART NO.:" at 1620,-2809 h45
  text "DATE:" at 3120,-2809 h45
  text "Vlamingstraat 19" at 4325,-2912 h60
  text ".PRINT_DATE" at 3070,-2929 h70
  text ".VariantName" at 1224,-2935 h78.74
  text ".RevisionNR" at -448,-2984 h98.43
  text "B-8560 Wevelgem" at 4320,-3032 h60
  text "SCALE:" at -480,-3109 h45
  text "DWG NO:" at 1620,-3109 h45
  text "FILE NAME:" at 3120,-3109 h45
  text ".PCB_FILE_NAME_NO_PATH" at 3070,-3229 h70
  text ".PCB_Nr" at 1315,-3239 h98.43
  text "A" at -489,-3435 h70 r90
  text "B" at 1403,-3435 h70 r90
  text "C" at 3313,-3435 h70 r90
  text "D" at 5203,-3435 h70 r90